# Altium PCB robot_control_pcb.PcbDoc
Units mm, origin at the board's own origin, x right, y up, seen from the top; angles counter-clockwise.
Board outline 100 x 40 mm, 2 copper layers (Top Layer, Bottom Layer); 54 components, 66 nets, 220 pads, 133 vias.
Unrouted connection lines stored in the file: 21.
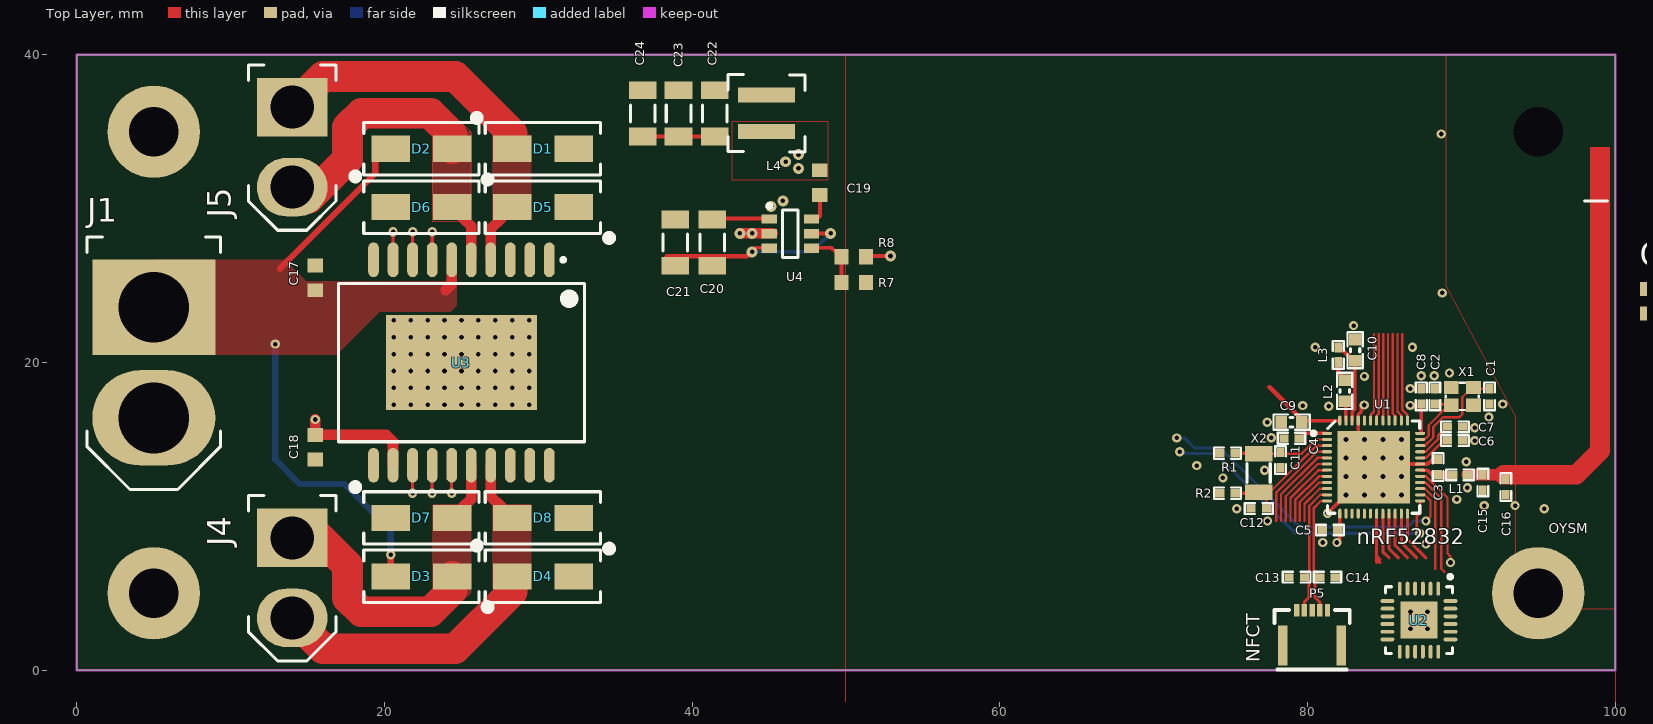
[diagram p0: Top Layer view]
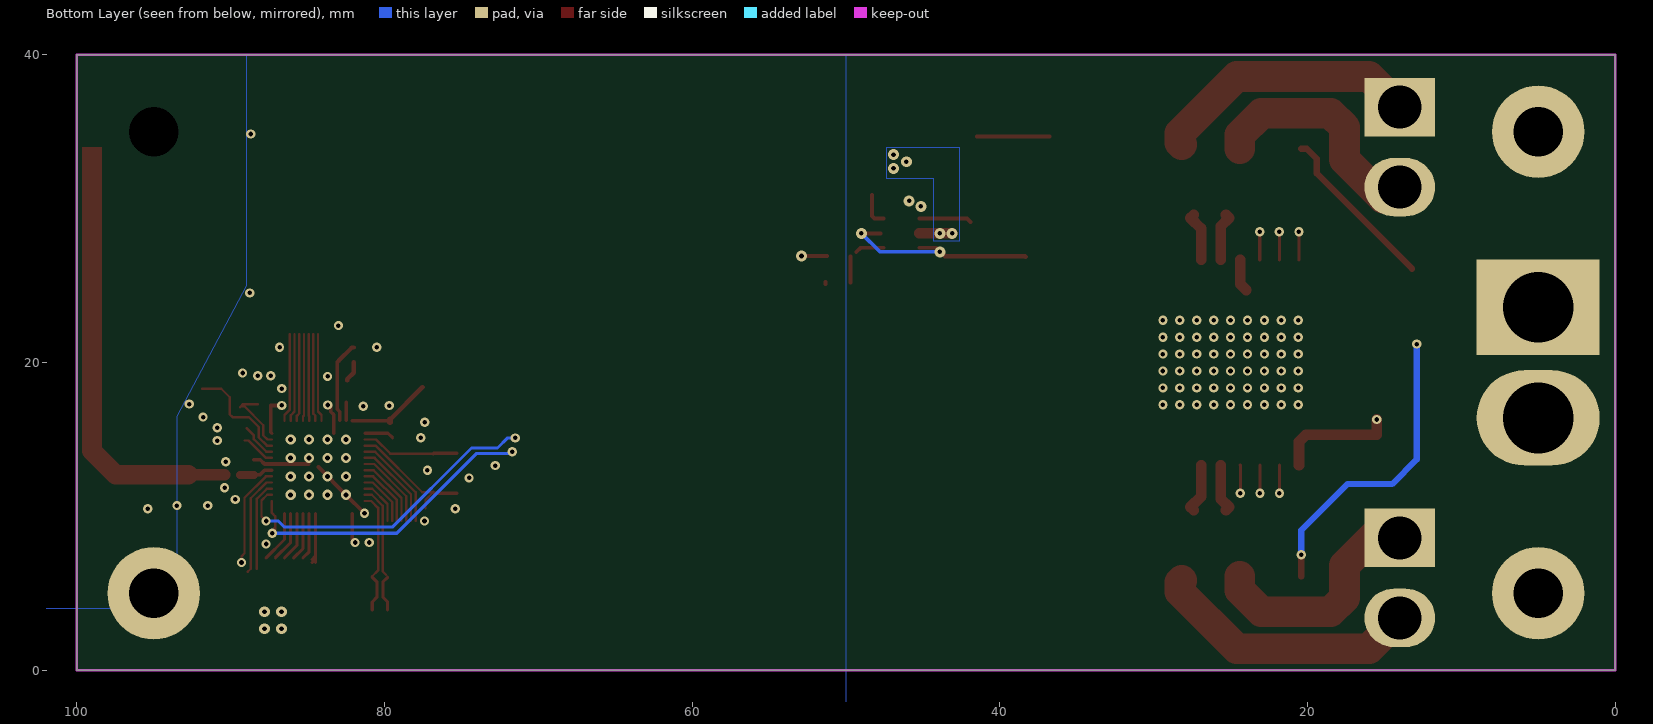
[diagram p1: Bottom Layer view, seen from below]
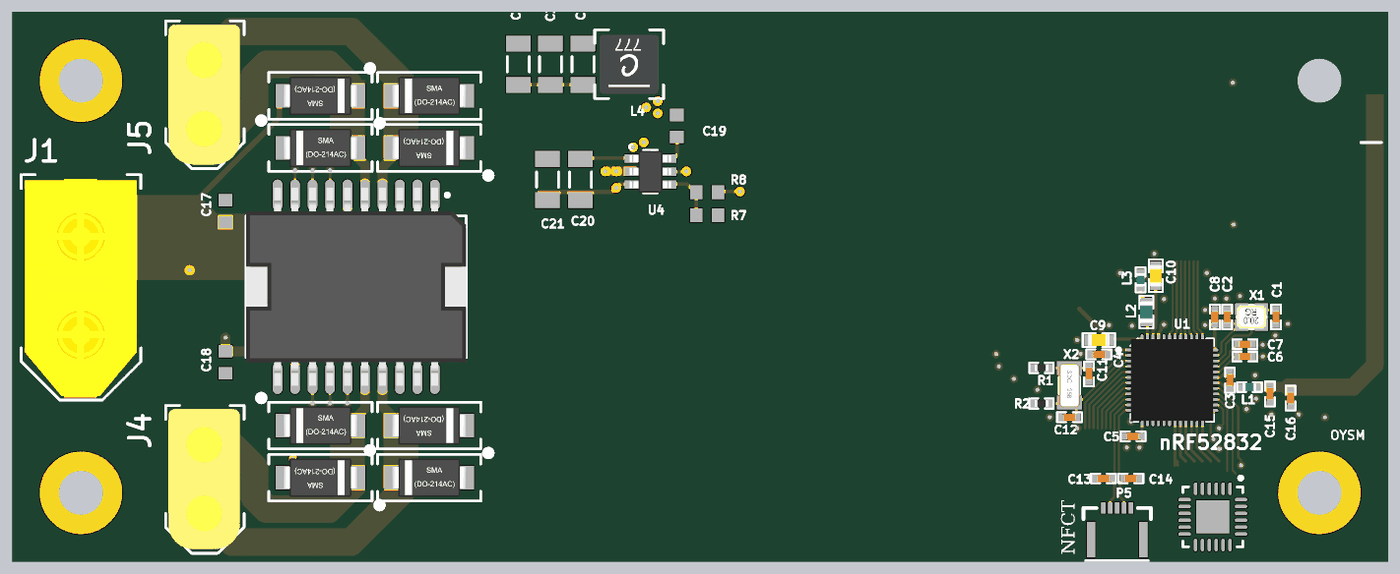
[diagram p2: 3D render of the assembled board from above, using the file's embedded part models]

## Layer stack, top to bottom
Top Solder: solder mask 0.0102, Solder Resist, Dk 3.5
Top Layer: signal copper 0.0356
Dielectric2: core 0.32, FR-4, Dk 4.8
Bottom Layer: signal copper 0.0356
Bottom Solder: solder mask 0.0102, Solder Resist, Dk 3.5

## Board outline
0,0 0,40 100,40 100,0

## Design rules (kind name [scope] priority, off if disabled: settings)
Clearance ANT_Clerance [InNet('ANT')] p1: gap=0.127 ignorepadtopadclearanceinfootprint=FALSE except(0: Arc-Hole Track-Hole SMDPad-Hole THPad-Hole Via-Hole Fill-Hole Poly-Hole Region-Hole Text-Hole)
Clearance Polygon_Clearance [(InNamedPolygon('Top_Layer-GND')) or (InNamedPolygon('Bottom_Layer-GND')) or (InNamedPolygon('Mid_Layer_1-GND')) or (InNamedPolygon('Mid_Layer_2-GND'))] p2: gap=0.254 ignorepadtopadclearanceinfootprint=FALSE except(0: Arc-Hole Track-Hole SMDPad-Hole THPad-Hole Via-Hole Fill-Hole Poly-Hole Region-Hole Text-Hole)
Clearance [All] p3: gap=0.15 ignorepadtopadclearanceinfootprint=FALSE except(0: Arc-Hole Track-Hole SMDPad-Hole THPad-Hole Via-Hole Fill-Hole Poly-Hole Region-Hole Text-Hole)
ComponentClearance [All] p1 off: gap=0.254 collisioncheckmode=3 verticalgap=0.254 showdistances=FALSE
DiffPairsRouting [All] p1: maxlimit=0.15 minlimit=0.15 mostfreqgap=0.15 toplayer_minwidth=0.381 toplayer_maxwidth=0.381 toplayer_prefwidth=0.381 bottomlayer_minwidth=0.381 bottomlayer_maxwidth=0.381 bottomlayer_prefwidth=0.381 maxuncoupledlength=12.7
FabricationTestPointUsage TestPointUsage [All] p1: valid=0 allowmultiple=FALSE
FabricationTestpoint Testpoint [All] p1: side=3 testpointundercomponent=TRUE minsize=1.016 maxsize=2.54 preferedsize=1.524 minholesize=0 maxholesize=1.016 preferedholesize=0.813 testpointgrid=0.025 allowsidetop=TRUE allowsidebottom=TRUE usegrid=TRUE gridtolerance=0
Height [All] p1 off: minheight=0 maxheight=25.4 prefheight=12.7
HoleSize [All] p1: absolutevalues=TRUE maxlimit=5 minlimit=0.3 maxpercent=80.000 minpercent=20.000
MinimumAnnularRing [All] p1 off: minimumring=0.152
PolygonConnect PolygonConnect_Motor [innet('MOTOR_L_A') or innet('MOTOR_L_B') or innet('MOTOR_R_A') or innet('MOTOR_R_B') or InNet('VCC_P14V4')] p1: connectstyle=Direct reliefconductorwidth=0.254 reliefentries=4 polygonreliefangle="90 Angle" airgapwidth=0.254
PolygonConnect PolygonConnect_Buck [innet('SW')] p2: connectstyle=Direct reliefconductorwidth=0.254 reliefentries=4 polygonreliefangle="90 Angle" airgapwidth=0.254
PolygonConnect [All] p3: connectstyle=Relief reliefconductorwidth=0.254 reliefentries=4 polygonreliefangle="90 Angle" airgapwidth=0.254
RoomDefinition pwr [InComponentClass('pwr')] p1: confinementstyle=ConfineIn formatcopy=TRUE lockcomponents=FALSE outline 35.5,24.3 53.503,24.3 53.503,39 35.5,39
RoomDefinition motor_drive [InComponentClass('motor_drive')] p2: confinementstyle=ConfineIn formatcopy=TRUE lockcomponents=FALSE outline 10,0 35.5,0 35.5,40 10,40
RoutingVias [All] p1: holewidth=0.3 width=0.6 viastyle="Through Hole" minholewidth=0.3 minwidth=0.6 maxholewidth=0.711 maxwidth=1.27
SilkToSolderMaskClearance SilkscreenOverComponentPads [IsPad] p1: minsilkscreentomaskgap=0.254 clearancetoexposedcopper=TRUE
SolderMaskExpansion [All] p1: expansion=0.076
Width [All] p1: maxlimit=2.54 minlimit=0.152 preferedwidth=0.2
23 further rules are at their usual default settings.

## Classes and differential pairs
component class robot_control_pcb: J1
component class pwr: C19 C20 C21 C22 C23 C24 L4 R7 R8 U4
component class motor_drive: C17 C18 D1 D2 D3 D4 D5 D6 D7 D8 J4 J5 U3
component class wheel_feedback: J2 J3
component class sensors: C25 U2
component class nrf: C1 C2 C3 C4 C5 C6 C7 C8 C9 C10 C11 C12 C13 C14 C15 C16 C? L1 L2 L3 P3 P5 R1 R2 R? U1 X1 X2

## Components (designator, comment, footprint, x,y, rotation, side; value= is the part's Value field where it differs from the comment)
C1 "12pF" CAPC1005X04L 91.844,17.797 r270 top
C2 "12pF" CAPC1005X04L 88.288,17.797 r90 top
C3 "0.8pF" CAPC1005X04L 88.491,13.2 r270 top
C4 "100nF" CAPC1005X04L 78.966,15.08 r180 top
C5 "100nF" CAPC1005X04L 81.455,9.111 r180 top
C6 "N.C." CAPC1005X04L 89.583,14.927 r180 top
C7 "100pF" CAPC1005X04L 89.583,15.816 r0 top
C8 "100nF" CAPC1005X04L 87.399,17.797 r90 top
C9 "4.7µF" CAPC1608X06L 78.966,16.121 r180 top
C10 "1.0µF" CAPC1608X06L 83.1,20.8 r270 top
C11 "12pF" CAPC1005X04L 78.255,13.657 r270 top
C12 "12pF" CAPC1005X04L 76.832,10.508 r180 top
C13 "300pF" CAPC1005X04L 79.3,6.05 r180 top
C14 "300pF" CAPC1005X04L 81.3,6.05 r180 top
C15 "N.C." CAPC1005X04L 91.4,12.2 r270 top
C16 "1.2pF" CAPC1005X04L 92.9,11.9 r270 top
C17 "100nF" CAPC0603(1608)55_N 15.5,25.5 r270 top
C18 "100nF" CAPC0603(1608)55_N 15.5,14.5 r90 top
C19 "100nF" CAPC0603(1608)55_N 48.3,31.7 r90 top
C20 "10uF" CAPC1206(3216)170_N 41.3,27.8 r270 top
C21 "10uF" CAPC1206(3216)170_N 38.9,27.8 r270 top
C22 "22uF" CAPC1206(3216)170_N 41.477,36.196 r90 top
C23 "22uF" CAPC1206(3216)170_N 39.115,36.196 r90 top
C24 "22uF" CAPC1206(3216)170_N 36.778,36.196 r90 top
C25 "100nF" CAPC0603(1608)55_N 102.117,23.982 r90 top
D1 "SS14" SMA_DO-214AC 30.3,33.9 r0 top
D2 "SS14" SMA_DO-214AC 22.4,33.9 r180 top
D3 "SS14" SMA_DO-214AC 22.4,6.1 r180 top
D4 "SS14" SMA_DO-214AC 30.3,6.1 r0 top
D5 "SS14" SMA_DO-214AC 30.3,30.1 r180 top
D6 "SS14" SMA_DO-214AC 22.4,30.1 r0 top
D7 "SS14" SMA_DO-214AC 22.4,9.9 r0 top
D8 "SS14" SMA_DO-214AC 30.3,9.9 r180 top
J1 "=navn" XT60_Male_Vertical 5,20 r90 top
J2 "B2B-XH-A (LF)(SN)" JST_2P 115.4,-4.5 r0 top
J3 "B2B-XH-A (LF)(SN)" JST_2P 107.5,-4.762 r0 top
J4 "=navn" XT30_Female_Vertical 14,6 r90 top
J5 "=navn" XT30_Female_Vertical 14,34 r90 top
L1 "3.9nH" INDC1005X04L 89.913,12.692 r0 top
L2 "10µH" INDC1608X06L 82.42,18.158 r270 top
L3 "15nH" INDC1005X04L 82,20.5 r270 top
L4 "XAL4030-332MEC" XAL4030 44.83,36.196 r90 top
P3 "Pin Header 2x5, 1.27mm" HDR_2x5-SMD-1.27mm-K 116.9,9.111 r0 top
P5 "FPC 0.5mm RA SMD" FPC_05P-0.5mm-RA-SMD 79.3,3.9 r0 top
R1 "0R" RESC1005X04L 74.8,14.1 r0 top
R2 "0R" RESC1005X04L 74.8,11.5 r0 top
R7 "33k" RESC0603(1608)_N 50.5,25.2 r0 top
R8 "10k" RESC0603(1608)_N 50.5,26.881 r180 top
U1 "nRF52832-QFAA" QFN40P600X600X90-48N 84.3,13.2 r0 top locked
U2 "MPU-9250" QFN05P40X40X02-24 87.25,3.25 r270 top
U3 "L298" SOIC127P1420X360_HS-21M 25,20 r270 top
U4 "TPS562200" SOT95P280X145-6N 46.38,28.379 r0 top
X1 "32MHz" BT-XTAL_2016 90.066,17.797 r180 top
X2 "32.768kHz" XTAL_3215 76.832,12.819 r270 top

## Footprints (in the part's own frame and the unit in brackets; to place one, negate y for a bottom-side part, rotate by r counter-clockwise, add the part's x,y. Pads: shape width x height; smd on the part's side, far side on the other; paste and mask are expansions set on the pad)
BT-XTAL_2016 [mm] "Crystal 2.0 x 1.6 mm"
  rect 0.95x0.85 smd: 1(-0.725,-0.575) 2(0.725,-0.575) 3(0.725,0.575) 4(-0.725,0.575)
  silkscreen extent -1.08,-0.88 1.08,0.88, body extent -1.05,-0.85 1.05,0.85, height 0.56
CAPC0603(1608)55_N [mm] "Chip Capacitor, Body 1.6x0.8mm, Height 0.55mm, IPC Medium Density"
  rect 0.9x1 smd: 1(-0.8,0) 2(0.8,0)
  body extent -0.87,-0.48 0.88,0.47, height 0.55
CAPC1005X04L [mm] "Chip Capacitor, 2-Leads, Body 1.0x0.5mm, IPC High Density"
  rect 0.6x0.5 smd: 1(-0.5,0) 2(0.5,0)
  silkscreen extent -0.9,-0.35 0.9,0.35, body extent -0.51,-0.25 0.51,0.25, height 0.5
CAPC1206(3216)170_N [mm] "Chip Capacitor, Body 3.2x1.6mm, Height 1.7mm, IPC Medium Density"
  rect 1.15x1.8 smd: 1(-1.5,0) 2(1.5,0)
  silkscreen extent -0.55,-0.8 0.55,0.8, body extent -1.7,-0.9 1.7,0.9, height 1.7
CAPC1608X06L [mm] "Chip Capacitor, 2-Leads, Body 1.6x0.8mm, IPC High Density"
  rect 0.75x0.8 smd: 1(-0.675,0) 2(0.675,0)
  silkscreen extent -1.17,-0.5 1.17,0.5, body extent -0.8,-0.43 0.8,0.43, height 0.8
FPC_05P-0.5mm-RA-SMD [mm] "FPC, 5-Leads, Pitch 0,5mm"
  rect 0.6x2.6 smd: 0(-0.9,-2.3) 0(2.9,-2.3)
  rect 0.35x0.8 smd: 1(0,0) 2(0.5,0) 3(1,0) 4(1.5,0) 5(2,0)
  silkscreen extent -1.45,-3.85 3.45,0, body extent -1.45,-3.85 3.45,0, height 2.05
HDR_2x5-SMD-1.27mm-K [mm] "SMT MICRO HEADER, (1,27) .050\" Keying Shroud"
  rect 0.76x2.4 smd: 1(-2.54,-1.95) 2(-2.54,1.95) 3(-1.27,-1.95) 4(-1.27,1.95) 5(0,-1.95) 6(0,1.95) 7(1.27,-1.95) 8(1.27,1.95) 9(2.54,-1.95) 10(2.54,1.95)
  silkscreen extent -3.17,-3.15 3.17,3.15, body extent -3.14,-2.92 3.14,2.92, height 6.11
INDC1005X04L [mm] "Chip Inductor, 2-Leads, Body 1.0x0.5mm, IPC High Density"
  rect 0.65x0.5 smd: 1(-0.475,0) 2(0.475,0)
  silkscreen extent -0.9,-0.35 0.9,0.35, body extent -0.5,-0.3 0.5,0.3, height 0.5
INDC1608X06L [mm] "Chip Inductor, 2-Leads, Body 1.6x0.8mm, IPC High Density"
  rect 0.75x0.8 smd: 1(-0.675,0) 2(0.675,0)
  silkscreen extent -1.17,-0.5 1.17,0.5, body extent -0.8,-0.48 0.8,0.48, height 0.8
JST_2P [mm]
  rect 1.8x1.8 hole 1: 1(0,-1.25)
  round 1.8 hole 1: 2(0,1.25)
  silkscreen extent -2.4,-3.73 3.4,3.73, body extent -2.4,-3.7 3.35,3.7, height 7
QFN05P40X40X02-24 [mm] "QFN24"
  oval 0.9x0.25 smd: 1(-2.05,1.25) 2(-2.05,0.75) 3(-2.05,0.25) 4(-2.05,-0.25) 5(-2.05,-0.75) 6(-2.05,-1.25) 13(2.05,-1.25) 14(2.05,-0.75) 15(2.05,-0.25) 16(2.05,0.25) 17(2.05,0.75) 18(2.05,1.25)
  oval 0.25x0.9 smd: 7(-1.25,-2.05) 8(-0.75,-2.05) 9(-0.25,-2.05) 10(0.25,-2.05) 11(0.75,-2.05) 12(1.25,-2.05) 19(1.25,2.05) 20(0.75,2.05) 21(0.25,2.05) 22(-0.25,2.05) 23(-0.75,2.05) 24(-1.25,2.05)
  rect 2.4x2.4 smd: 25(0,0)
  silkscreen extent -2.95,-2.17 2.17,2.18, body extent -2.02,-2.02 2.02,2.02, height 0.85
QFN40P600X600X90-48N [mm] "QFN, 48-Leads, Body 6,0x6,0mm (max), Pitch 0,40mm, IPC Medium Density"
  oval 0.65x0.2 smd: 1(-3.025,2.2) 2(-3.025,1.8) 3(-3.025,1.4) 4(-3.025,1) 5(-3.025,0.6) 6(-3.025,0.2) 7(-3.025,-0.2) 8(-3.025,-0.6) 9(-3.025,-1) 10(-3.025,-1.4) 11(-3.025,-1.8) 12(-3.025,-2.2) 25(3.025,-2.2) 26(3.025,-1.8) 27(3.025,-1.4) 28(3.025,-1) 29(3.025,-0.6) 30(3.025,-0.2) 31(3.025,0.2) 32(3.025,0.6) 33(3.025,1) 34(3.025,1.4) 35(3.025,1.8) 36(3.025,2.2)
  oval 0.2x0.65 smd: 13(-2.2,-3.025) 14(-1.8,-3.025) 15(-1.4,-3.025) 16(-1,-3.025) 17(-0.6,-3.025) 18(-0.2,-3.025) 19(0.2,-3.025) 20(0.6,-3.025) 21(1,-3.025) 22(1.4,-3.025) 23(1.8,-3.025) 24(2.2,-3.025) 37(2.2,3.025) 38(1.8,3.025) 39(1.4,3.025) 40(1,3.025) 41(0.6,3.025) 42(0.2,3.025) 43(-0.2,3.025) 44(-0.6,3.025) 45(-1,3.025) 46(-1.4,3.025) 47(-1.8,3.025) 48(-2.2,3.025)
  rect 4.7x4.7 smd: 49(0,0)
  silkscreen extent -4.02,-3 3,3, body extent -3.02,-3.02 3.02,3.02, height 0.86
RESC0603(1608)_N [mm] "Chip Resistor, Body 1.6x0.8mm, IPC Medium Density"
  rect 0.9x1 smd: 1(-0.8,0) 2(0.8,0)
  body extent -0.85,-0.47 0.85,0.47, height 0.6
RESC1005X04L [mm] "Chip Resistor, 2-Leads, Body 1.0x0.5mm, IPC High Density"
  rect 0.6x0.55 smd: 1(-0.5,0) 2(0.5,0)
  silkscreen extent -0.87,-0.38 0.88,0.38, body extent -0.5,-0.25 0.5,0.25, height 0.3
SMA_DO-214AC [mm]
  rect 2.5x1.7 smd: 1(-2,0) 2(2,0)
  silkscreen extent -4.5,-1.7 3.75,2.2, body extent -2.75,-1.4 2.75,1.4, height 2.6
SOIC127P1420X360_HS-21M [mm] "SOIC, 20-Leads, Body 15,90x11,00mm, Pitch 1,27mm, Thermal Pad 9,80x6,20mm, IPC Low Density"
  oval 2.25x0.7 smd: 1(-6.675,5.715) 2(-6.675,4.445) 3(-6.675,3.175) 4(-6.675,1.905) 5(-6.675,0.635) 6(-6.675,-0.635) 7(-6.675,-1.905) 8(-6.675,-3.175) 9(-6.675,-4.445) 10(-6.675,-5.715) 11(6.675,-5.715) 12(6.675,-4.445) 13(6.675,-3.175) 14(6.675,-1.905) 15(6.675,-0.635) 16(6.675,0.635) 17(6.675,1.905) 18(6.675,3.175) 19(6.675,4.445) 20(6.675,5.715)
  rect 6.2x9.8 smd: 21(0,0)
  silkscreen extent -6.8,-8 5.15,8, body extent -7.2,-8 7.2,8, height 3.6
SOT95P280X145-6N [mm] "SOT23, 6-Leads, Body 2,90x2,80mm, Pitch 0,95mm, IPC Medium Density"
  rect 1x0.6 smd: 1(-1.375,0.95) 2(-1.375,0) 3(-1.375,-0.95) 4(1.375,-0.95) 5(1.375,0) 6(1.375,0.95)
  silkscreen extent -1.5,-1.55 0.5,1.92, body extent -1.5,-1.53 1.5,1.53, height 1.45
XAL4030 [mm] "SMD Inductor"
  rect 0.98x3.7 smd: 1(-1.185,0) 2(1.185,0)
  silkscreen extent -2.5,-2.5 2.52,2.5, body extent -2.15,-2.15 2.15,2.15, height 3
XT30_Female_Vertical [mm]
  rect 3.8x4.6 hole 2.8: 1(2.6,0)
  oval 3.8x4.6 hole 2.8: 2(-2.6,0)
  silkscreen extent -5.4,-2.85 5.35,2.85, body extent -5.1,-2.55 5.1,2.65, height 9.5
XT60_Male_Vertical [mm]
  rect 6.2x8 hole 4.6: 1(3.6,0)
  oval 6.2x8 hole 4.6: 2(-3.6,0)
  silkscreen extent -8.25,-4.35 8.15,4.35, body extent -8.05,-4.05 7.85,4.1, height 16.3
XTAL_3215 [mm] "XTAL SMD 3.2 x 1.5 mm"
  rect 1x1.8 smd: 1(-1.25,0) 2(1.25,0)
  silkscreen extent -0.6,-0.75 0.6,0.75, body extent -1.6,-0.75 1.6,0.75, height 0.81

## Part data
C1 C2 C11 C12: library part C0402-12p, "Capacitor, NP0, ±2%", Artikkelnr Noca=20029159, Artikkelnr Simpro=N.A., Footprint Doc=0402, LatestRevisionDate=2011-05-11, Note=50V, Part Number=C0402-12p, Pin Count=2, Published=2009-05-08, Publisher="Nordic Semiconductor"
C3: library part C0402-0.8p, "Capacitor, NP0, ±5%", Artikkelnr Noca=20029147, Artikkelnr Simpro=N.A., Footprint Doc=0402, LatestRevisionDate=2012-11-21, Note=50V, Part Number=C0402-0.8p, Pin Count=2, Published=2009-05-08, Publisher="Nordic Semiconductor"
C4 C5 C8: library part C0402-100n, "Capacitor, X7R, ±10%", Artikkelnr Noca=20039200, Artikkelnr Simpro=N.A., Footprint Doc=0402, LatestRevisionDate=2009-11-23, Note=16V, Part Number=C0402-100n, Pin Count=2, Published=2009-05-08, Publisher="Nordic Semiconductor"
C6 C15: library part C0402-N.C., "Not mounted", Artikkelnr Noca=N.A., Artikkelnr Simpro=N.A., Footprint Doc=0402, LatestRevisionDate=2009-05-08, Note="Chip Cap", Part Number=C0402-N.C., Pin Count=2, Published=2009-05-08, Publisher="Nordic Semiconductor"
C7: library part C0402-100p, "Capacitor, NP0, ±5%", Artikkelnr Noca=20029135, Artikkelnr Simpro=N.A., Footprint Doc=0402, LatestRevisionDate=2009-05-08, Note=50V, Part Number=C0402-100p, Pin Count=2, Published=2009-05-08, Publisher="Nordic Semiconductor"
C9: library part C0603-4µ7, "Capacitor, X5R, ±10%", Artikkelnr Noca=20069060, Artikkelnr Simpro=N.A., Footprint Doc=0603, LatestRevisionDate=2009-11-23, Note=6.3V, Part Number=C0603-4µ7, Pin Count=2, Published=2009-05-08, Publisher="Nordic Semiconductor"
C10: library part C0603-1µ0, "Capacitor, X7R, ±10%", Artikkelnr Noca=20039335, Artikkelnr Simpro=N.A., Footprint Doc=0603, LatestRevisionDate=2013-06-05, Note=16V, Part Number=C0603-1µ0, Pin Count=2, Published=2009-05-08, Publisher="Nordic Semiconductor"
C13 C14: library part C0402-300p, "Capacitor, NP0, ±5%", Supplier part number=490-3234-1-ND, Artikkelnr Noca=N.A., Artikkelnr Simpro=N.A., Footprint Doc=0402, LatestRevisionDate=2015-05-29, Note=50V, Part Number=C0402-300p, Pin Count=2, Published=2015-05-29, Publisher="Nordic Semiconductor", Supplier=Digi-Key
C16: library part C0402-1.2p, "Capacitor, NP0, ±0.1pF", Artikkelnr Noca=20029157, Artikkelnr Simpro=N.A., Footprint Doc=0402, LatestRevisionDate=2011-05-11, Note=50V, Part Number=C0402-1.2p, Pin Count=2, Published=2009-05-08, Publisher="Nordic Semiconductor"
C17 C18 C19 C25: library part 5152, "X7R 50V 5%", antall=1000, dybde=0, hylle=0, id=5152, komponenttype=2, lager_type=Baklager, leverandor=Farnell, leverandor_varenr=1759122, navn=100nF, nokkelord="Kondensator, Capacitor, CAP", pakke_opprettet_av=815, pakketype=0603, pris=1, produsent=Multikomp, rad=21, rom=OV, symbol_opprettet_av=815
  C17 C18 C25: pakke_opprettet="2015-02-18 14:18:13", symbol_opprettet="2014-11-14 20:19:34"
  C19: pakke_opprettet="18.02.2015 14:18:13", symbol_opprettet="14.11.2014 20:19:34"
C20 C21: library part 5059, "X5R 50V 10%", id=5059, komponenttype=2, leverandor=Farnell, leverandor_varenr=1845762, navn=10uF, nokkelord="Kondensator, capacitor", pakke_opprettet="11.02.2015 13:21:22", pakke_opprettet_av=815, pakketype=1206, pris=6, produsent=Murata, symbol_opprettet="14.11.2014 20:19:34", symbol_opprettet_av=815
C22 C23 C24: library part 5192, "10V 10% Tantalum", id=5192, komponenttype=2, leverandor=Farnell, leverandor_varenr=1457420, navn=22uF, nokkelord="Capacitor Cap Kondis", pakke_opprettet="11.02.2015 13:21:22", pakke_opprettet_av=815, pakketype=1206, pris=3, produsent=Kemet, symbol_opprettet="14.11.2014 20:19:34", symbol_opprettet_av=815
D1 D2 D3 D4 D5 D6 D7 D8: library part 5642, beskrivelse="SS14-E3/61T - Schottky Rectifier, 40 V, 1 A, Single, DO-214AC, 2 Pins, 500 mV", id=5642, komponenttype=9, leverandor=Farnell, leverandor_varenr=9551280, navn=SS14, nokkelord=Diode, pakke_opprettet="19/01/2020 14:48:44", pakke_opprettet_av=815, pakketype=DO, pris=4, produsent=Vishay, symbol_opprettet="28/06/2014 15:20:09", symbol_opprettet_av=815
J1: library part 4544, "For å koble ledninger sammen", id=4544
J2 J3: library part 4043, antall=120, beskrivelse="JST 2pin (pris pr. stk.)", dybde=0, hylle=6, id=4043, komponenttype=11, lager_type=Fremlager, leverandor=Farnell, leverandor_varenr=1516276, navn="B2B-XH-A (LF)(SN)", nokkelord="Connector, Kontakt", pakke_opprettet="28/06/2014 18:25:03", pakke_opprettet_av=815, pakketype=TH, pris=2, produsent=JST, rad=3, rom=OV, symbol_opprettet="28/06/2014 15:33:17", symbol_opprettet_av=815
J4 J5: library part 4550, "Pris per del, For å koble ledninger sammen", id=4550
L1: library part L0402-3n9, "High frequency chip inductor ±5%", Manufacturer=Murata, Manufacturer Part Number=LQP15MN3N9B02D, Supplier part number=490-1131-1-ND, Artikkelnr Noca=33029151, Artikkelnr Simpro=N.A., Datasheet=http://search.murata.co.jp/Ceramy/image/img/PDF/ENG/L0075S0084LQP15M.pdf, Footprint Doc=0402, LatestRevisionDate=2012-09-19, Note="High frequency chip inductor ±5%", Part Number=L0402-3n9, Pin Count=2, Published=2009-05-08, Publisher="Nordic Semiconductor", Supplier=Digi-Key
L2: library part L0603-10µ, "Chip inductor, IDC,min = 50 mA, ±20%", 2nd source part number=178-6105, Manufacturer="Taiyo Yuden", Manufacturer Part Number=LBMF1608T100K, Supplier part number=587-1714-1-ND, 2nd source Supplier=Farnell, Artikkelnr Noca=33029314, Artikkelnr Simpro=N.A., Datasheet=http://www.yuden.co.jp/ut/product/pdf/elb2_e.pdf, Footprint Doc=0603, LatestRevisionDate=2012-09-19, Note="LBMF1608T100K 10µH 80mA 0603", Part Number=L0603-10µ, Pin Count=2, Published=2010-02-24, Publisher="Nordic Semiconductor", Supplier=Digi-Key
L3: library part L0402-15n, "High frequency chip inductor ±10%", 2nd source part number=658-1328, Manufacturer="Taiyo Yuden", Manufacturer Part Number=HK100515NJ-T, Supplier part number=587-1521-1-ND, 2nd source Supplier=Farnell, Artikkelnr Noca=33029323, Artikkelnr Simpro=N.A., Datasheet=http://www.yuden.co.jp/productdata/catalog/en/mlci04_e.pdf, Footprint Doc=0402, LatestRevisionDate=2012-09-19, Note="High frequency chip inductor ±10%", Part Number=L0402-15n, Pin Count=2, Published=2010-07-12, Publisher="Nordic Semiconductor", Supplier=Digi-Key
L4: library part 5644, "3.3µH", id=5644, komponenttype=3, leverandor=Farnell, leverandor_varenr=2289055, navn=XAL4030-332MEC, nokkelord="3.3uH, 3u3H, 3,3uH, 3µ3H", pakke_opprettet="23.01.2020 22:27:27", pakke_opprettet_av=815, pakketype=SMD, pris=40, produsent=Coilcraft, symbol_opprettet="27.05.2015 00:20:21", symbol_opprettet_av=924
P3: library part "Pin Header 2x5 SMD, 1.27mm, KS", "Pin Header 2x5, 1.27mm (50mil), SMD, Keying Shroud", 2nd source part number=FTSH-105-01-F-DV-K, Manufacturer=W-CON, Manufacturer Part Number=3132-10MS0BK00R1, 2nd source Supplier=Samtec, Artikkelnr Noca=55010009, Artikkelnr Simpro=N.A., Datasheet=\\hizz\pro\app9717\Datasheet\connectores\W-CON\3132-XXMXXBK00XX.pdf, Footprint Doc=HDR_2x5-SMD-1.27mm, LatestRevisionDate=2016-04-21, Part Number="Pin Header 2x5 SMD, 1.27mm, KS", Pin Count=10, Published=2016-01-22, Publisher="Nordic Semiconductor", Supplier=Cabcon, Supplier part number=3132-10MS0BK00R1
P5: library part FPC_05P-0.5mm-RA-SMD, "0.5mm FPC, 5P,Right Angle SMT,Double Contact,H=1.2mm,White, Tin plated", 2nd source part number=WM9836CT-ND, Manufacturer=W-CON, Manufacturer Part Number=5141-05RZDNWR01, 2nd source Supplier=Digi-Key, Artikkelnr Noca=55010020, Artikkelnr Simpro=N.A., Datasheet=\\hizz\pro\app9717\Datasheet\connectores\W-CON\5141-XXRZDNXX0X.pdf, Footprint Doc=FPC_05P-0.5mm-RA-SMD, LatestRevisionDate=2016-04-21, Part Number=FPC_05P-0.5mm-RA-SMD, Pin Count=7, Published=2015-06-22, Publisher="Nordic Semiconductor", Supplier=Cabcon, Supplier part number=5141-05RZDNWR01
R1 R2: library part R0402-0R, "Resistor, ±5%, 0.063W", Supplier part number=146-9661, Value Ohm=0, Artikkelnr Noca=27049000, Artikkelnr Simpro=N.A., Footprint Doc=0402, LatestRevisionDate=2009-11-23, Note="Chip Res 5%", Part Number=R0402-0R, Pin Count=2, Published=2009-05-08, Publisher="Nordic Semiconductor", Supplier=Farnell
R7: library part 5397, "0.1W 1% Thick film resistor", antall=100, dybde=84, hylle=2, id=5397, komponenttype=1, lager_type=Fremlager, navn=33k, pakke_opprettet="08.07.2014 21:15:30", pakke_opprettet_av=815, pakketype=0603, pris=0, rad=-1, rom=OV, symbol_opprettet="08.07.2014 21:16:33", symbol_opprettet_av=815
R8: library part 5264, "0.1W 1% Thick film resistor", antall=1200, dybde=3, hylle=6, id=5264, komponenttype=1, lager_type=Baklager, leverandor=Farnell, leverandor_varenr=2447230, navn=10k, nokkelord="Resistor Motstand", pakke_opprettet="08.07.2014 21:15:30", pakke_opprettet_av=815, pakketype=0603, pris=0, produsent=Multikomp, rad=1, rom=OV, symbol_opprettet="08.07.2014 21:16:33", symbol_opprettet_av=815
U1: "Multi-protocol Bluetooth Low Energy and 2.4GHz proprietary system-on-chip", Manufacturer="Nordic Semiconductor", Artikkelnr Noca=N.A., Artikkelnr Simpro=N.A., Footprint Doc=QFN-48, LatestRevisionDate=2014-11-26, Manufacturer Part Number=nRF52832-QFAA, Part Number=nRF52832-QFAA, Pin Count=48, Published=2014-11-26, Publisher="Nordic Semiconductor", Supplier="Nordic Semiconductor"
U2: library part 5302, "=beskrivelse", antall=40, beskrivelse="MotionTracking device", dybde=0, hylle=2, id=5302, kolonne=4, komponenttype=6, lager_type=Fremlager, navn=MPU-9250, nokkelord="Narrow Band Multi-Channel RF Transceiver Module", pakke_opprettet="22.01.2016 16:18:46", pakke_opprettet_av=815, pakketype=QFN, pris=0, produsent=InvenSense, rad=4, rom=OV, symbol_opprettet="22.01.2016 16:19:50", symbol_opprettet_av=815
U3: library part 5620, "Dual H Bridge", id=5620, komponenttype=15, leverandor=Farnell, leverandor_varenr=2762686, navn=L298, nokkelord="h-bro, h-bridge, driver, motor driver, motordriver, l298n", pakke_opprettet="18.01.2020 20:43:17", pakke_opprettet_av=815, pakketype=SMD, pris=84, produsent=ST, symbol_opprettet="18.01.2020 20:24:51", symbol_opprettet_av=815
U4: library part 5645, beskrivelse="DC-DC Switching Buck Step Down Regulator, Adjustable, 4.5V-17Vin, 760mV-7Vout, 2Aout", id=5645, komponenttype=15, leverandor=Farnell, leverandor_varenr=2420234, navn=TPS562200, pakke_opprettet="25.11.2016 18:04:01", pakke_opprettet_av=1335, pakketype=SOT-23, pris=12, produsent="Texas Instruments", symbol_opprettet="23.01.2020 22:46:07", symbol_opprettet_av=815
X1: library part XTAL_SMD2016_32MHz_8pF_Epson, "XTAL SMD 2016, 32MHz, Cl=8pF, Total Tol: ±40ppm", Manufacturer="Epson Toyocom", Manufacturer Part Number=Q22FA12800025, Supplier part number=171-2806, Artikkelnr Noca=N.A., Artikkelnr Simpro=N.A., Datasheet=http://www.epsondevice.com/docs/qd/en/DownloadServlet?id=ID000449, Footprint Doc=XTAL_2016, LatestRevisionDate=2014-11-27, Note="XTAL SMD 32.000MHz", Part Number=XTAL_SMD2016_32MHz_8pF_Epson, Pin Count=4, Published=2012-03-09, Publisher="Nordic Semiconductor", Supplier=Farnell
X2: library part "XTAL_FC-135 32.768k", "XTAL SMD 3215, 32.768kHz, 9pF, ±20ppm", 2nd source part number=127-8037, Manufacturer="Epson Toyocom", Manufacturer Part Number="FC-135 32.768KHZ ±20PPM,9.0PF", Supplier part number="FC-135 32.7680KA-AC-ND", 2nd source Supplier=Farnell, Artikkelnr Noca=22019091, Artikkelnr Simpro=N.A., Datasheet=http://www.farnell.com/datasheets/57480.pdf, Footprint Doc=XTAL_3215, LatestRevisionDate=2014-03-27, Note="XTAL SMD 32.768kHz, 3215", Part Number="XTAL_FC-135 32.768k", Pin Count=2, Published=2010-10-18, Publisher="Nordic Semiconductor", Supplier=Digi-Key

## Free pads (board coordinates)
  round 6 hole 3.2: 0(5,5) 0(5,35) 0(95,5)
  round 0 hole 3.2 unplated: 0(95,35)

## Via types
v1: diameter 0.6, hole 0.3, Top Layer to Bottom Layer, 56 vias
v2: diameter 0.6, hole 0.3, Top Layer to Bottom Layer, tented both sides, 47 vias
v3: diameter 0.66, hole 0.33, Top Layer to Bottom Layer, tented both sides, 16 vias
v4: diameter 0.711/0.711 (per signal layer), hole 0.305, Top Layer to Bottom Layer, 10 vias
v5: diameter 0.7, hole 0.3, Top Layer to Bottom Layer, 4 vias

## Nets (pads, with @x,y where several pads share a name; then routed paths per layer and width w, separated by ;. In a path a pad name is that pad's centre, name@x,y a point inside that pad or via, vN(x,y) a via of type N, cw(c..) or ccw(c..) an arc to the next point about the centre after c; other vN are vias at no path point)
ANT: C15.1 C16.1 L1.2 | length 30.5
  Top Layer w0.762: L1.2@90.396,12.698 91.4,12.704 95.004,12.723
  Top Layer w1.27: 92.77,12.7 97.459,12.7 99.018,14.259 99.018,33.3
DEC1: C4.1 U1.1 | length 1.9
  Top Layer w0.203: C4.1@79.47,15.099 79.771,15.4 U1.1
DEC2: C6.2 U1.32 | length 2.2
  Top Layer w0.152: U1.32 87.711,13.8 88.838,14.927 C6.2 C6.2@89.101,14.927
DEC3: C7.1 U1.33 | length 2.4
  Top Layer w0.152: U1.33 87.68,14.2 88.491,15.011 88.491,15.262 C7.1@88.975,15.746
DEC4: C10.2 L3.1 U1.46 | length 5.3
  Top Layer w0.229: U1.46@82.9,16.256 82.9,16.811 83.087,16.998 83.087,20.013 C10.2@82.975,20.125
  Top Layer w0.279: L3.1 82.125,20.975 C10.2@82.975,20.125
"Enable A": U3.8 | length 1.8
  Top Layer w0.2: U3.8@21.823,26.673 21.828,26.678 v2(21.828,28.497)
"Enable B": U3.14 | length 1.8
  Top Layer w0.2: v2(23.093,11.503) 23.093,13.323 U3.14@23.098,13.328
GND: C1.2 C2.2 C3.1 C4.2 C5.2 C6.1 C7.2 C8.2 C9.2 C10.1 C11.2 C12.2 C13.2 C14.1 C15.2 C16.2 C17.1 C18.1 C20.1 C21.1 C22.1 C23.1 C24.1 C25.1 D5.1 D6.1 D7.1 D8.1 J1.2 P3.3 P3.5 P3.9 pad.0@5,5 pad.0@5,35 pad.0@95,5 R8.1 U1.31 U1.45 U1.49 U3.1 U3.2 U3.10 U3.11 U3.19 U3.20 U3.21 U4.1 X1.2 X1.4 | length 19.6
  Top Layer w0.229: U1.49@83.3,15.4 U1.45 83.3,16.62 83.487,16.807 v2@83.487,17.239 ; U1.49@84.918,13.403 87.799,13.403 88.086,13.69 C3.1@88.499,13.69
  Top Layer w0.254: C24.1 C23.1 C22.1 ; C20.1@41.896,29.129 42.138,29.37 U4.1@45.237,29.37 ; R8.1@51.237,26.925 v4(52.888,26.925) ; v2(81.303,10.2) 81.303,10.203 v3(82.5,11.4) U1.49
  other v1: 20.6,17.25 21.7,17.25 22.8,17.25 23.9,17.25 25,17.25 26.1,17.25 27.2,17.25 28.3,17.25 29.4,17.25 20.6,18.35 21.7,18.35 22.8,18.35 23.9,18.35 25,18.35 26.1,18.35 27.2,18.35 28.3,18.35 29.4,18.35 20.6,19.45 21.7,19.45 22.8,19.45 23.9,19.45 25,19.45 26.1,19.45 27.2,19.45 28.3,19.45 29.4,19.45 20.6,20.55 21.7,20.55 22.8,20.55 23.9,20.55 25,20.55 26.1,20.55 27.2,20.55 28.3,20.55 29.4,20.55 20.6,21.65 21.7,21.65 22.8,21.65 23.9,21.65 25,21.65 26.1,21.65 27.2,21.65 28.3,21.65 29.4,21.65 20.6,22.75 21.7,22.75 22.8,22.75 23.9,22.75 25,22.75 26.1,22.75 27.2,22.75 28.3,22.75 29.4,22.75
  other v2: 87.7,8.2 81,8.3 77.4,9.7 75.4,10.5 95.4,10.5 91.5,10.7 93.5,10.7 89.7,11.1 90.396,11.854 74.5,12.5 77.213,12.997 72.8,13.3 90.324,13.55 90.879,14.927 77.645,15.105 90.879,15.765 77.391,16.121 91.793,16.451 81.379,17.162 79.7,17.2 83.69,17.239 92.7,17.3 86.688,18.305 83.7,19.1 87.399,19.144 88.237,19.144 89.228,19.321 80.5,21 86.822,21 83,22.4 88.756,24.529 88.7,34.859
  other v3: 83.7,11.4 84.9,11.4 86.1,11.4 82.5,12.6 83.7,12.6 84.9,12.6 86.1,12.6 82.5,13.8 83.7,13.8 84.9,13.8 86.1,13.8 82.5,15 83.7,15 84.9,15 86.1,15
  other v4: 45.135,30.157 45.897,30.513
"Input 1": U3.7 | length 1.8
  Top Layer w0.2: U3.7 23.1,26.68 v2(23.1,28.5)
"Input 2": U3.9 | length 1.8
  Top Layer w0.2: U3.9@20.553,26.673 20.558,26.678 v2(20.558,28.497)
"Input 3": U3.13 | length 1.8
  Top Layer w0.2: v2(21.823,11.503) 21.823,13.323 U3.13@21.828,13.328
"Input 4": U3.15 | length 1.8
  Top Layer w0.2: v2(24.363,11.503) 24.363,13.323 U3.15@24.368,13.328
MOTOR_L_A: D1.1 D5.2 J5.1 U3.4 | length 20.7
  Top Layer w0.7: U3.4 26.905,28.705 27.6,29.4 D5.2@27.4,29.6
  Top Layer w2: J5.1 16,38.6 24.6,38.6 28.3,34.9 28.3,34.3 D1.1@28.175,34.175
MOTOR_L_B: D2.1 D6.2 J5.2 U3.5 | length 18.9
  Top Layer w0.7: D6.2@25.3,29.6 25.1,29.4 25.635,28.865 U3.5
  Top Layer w2: J5.2 14.4,31.4 15.1,30.7 17.6,33.2 17.6,35.3 18.5,36.2 23,36.2 24.4,34.8 24.4,34.2 D2.1
MOTOR_R_A: D3.1 D7.2 J4.1 U3.16 | length 18.9
  Top Layer w0.7: D7.2@25.3,10.4 25.1,10.6 25.635,11.135 U3.16
  Top Layer w2: J4.1 14.4,8.6 15.1,9.3 17.6,6.8 17.6,4.7 18.5,3.8 23,3.8 24.4,5.2 D3.1
MOTOR_R_B: D4.1 D8.2 J4.2 U3.17 | length 20.7
  Top Layer w0.7: U3.17 26.905,11.295 27.6,10.6 D8.2@27.4,10.4
  Top Layer w2: J4.2 16,1.4 24.6,1.4 28.3,5.1 28.3,5.7 D4.1@28.175,5.825
NetC3_2: C3.2 L1.1 U1.30 | length 2.2
  Top Layer w0.229: U1.30 87.8,13 88.11,12.69 C3.2@88.499,12.69
  Top Layer w0.508: C3.2@88.491,12.695 L1.1@89.388,12.695
NetL2_1: L2.1 L3.2 | length 1.4
  Top Layer w0.279: L3.2 82,19.341 82.42,18.921 L2.1
NetL2_2: L2.2 U1.47 | length 1.1
  Top Layer w0.229: U1.47@82.5,16.256 L2.2@82.5,17.404
P0.00: R1.1
P0.00/XL1: C11.1 R1.2 U1.2 X2.1 | length 6.4
  Top Layer w0.152: X2.1 79.617,14.069 80.548,15 U1.2
  Top Layer w0.2: R1.2 76.801,14.1 X2.1
P0.01: R2.1
P0.01/XL2: C12.1 R2.2 U1.3 X2.2 | length 8.5
  Top Layer w0.152: C12.1 77.332,11.069 X2.2 77.548,11.569 80.579,14.6 U1.3
  Top Layer w0.2: R2.2 76.763,11.5 X2.2
P0.02/AIN0: U1.4 | length 6.3
  Top Layer w0.152: 77.978,9.7 77.978,11.567 80.611,14.2 U1.4
P0.03/AIN1: U1.5 | length 5.7
  Top Layer w0.152: 78.281,9.7 78.281,11.438 80.643,13.8 U1.5
P0.04/AIN2: U1.6 | length 5.2
  Top Layer w0.152: 78.586,9.7 78.586,11.311 80.675,13.4 U1.6
P0.05/AIN3: U1.7 | length 4.6
  Top Layer w0.152: 78.894,9.7 78.894,11.184 80.709,13 U1.7
P0.06: U1.8 | length 4.1
  Top Layer w0.152: 79.198,9.7 79.198,11.058 80.74,12.6 U1.8
P0.07: U1.9 | length 3.5
  Top Layer w0.152: 79.503,9.7 79.503,10.932 80.771,12.2 U1.9
P0.08: U1.10 | length 3
  Top Layer w0.152: 79.808,9.7 79.808,10.805 80.803,11.8 U1.10
P0.09/NFC1: C13.1 P5.2 U1.11 | length 8.4
  Top Layer w0.152: C13.1@79.9,6.2 80.113,6.413 80.113,10.679 80.834,11.4 U1.11
  Top Layer w0.2: P5.2 79.8,4.432 80.1,4.732 80.1,5.75 C13.1
P0.10/NFC2: C14.2 P5.4 U1.12 | length 8.1
  Top Layer w0.152: C14.2@80.8,6.1 80.418,6.482 80.418,10.553 80.865,11 U1.12
  Top Layer w0.2: P5.4 80.8,4.432 80.5,4.732 80.5,5.75 C14.2
P0.11: U1.14
P0.12: U1.15
P0.13: U1.16
P0.14/TRACEDATA3: U1.17
P0.15/TRACEDATA2: U1.18
P0.16/TRACEDATA1: U1.19 | length 4.1
  Top Layer w0.2: U1.19 84.5,7 84.5,7.2 ; 84.7,7 84.5,7.2 ; 84.7,7.2 84.5,7.4 84.5,7.2
P0.17: U1.20 | length 3
  Top Layer w0.2: U1.20 84.9,7.7 85.3,7.3
P0.18/SWO/TRCD0: P3.6 U1.21 | length 3.1
  Top Layer w0.2: U1.21 85.3,7.9 85.9,7.3
P0.19: U1.22 | length 3.2
  Top Layer w0.2: U1.22 85.7,8.1 86.5,7.3
P0.20/TRACECLK: U1.23 | length 3.3
  Top Layer w0.2: U1.23 86.1,8.3 87.1,7.3
P0.21/RESET: P3.10 U1.24 | length 3.4
  Top Layer w0.2: U1.24 86.5,8.5 87.7,7.3
P0.22: U1.27 | length 5.8
  Top Layer w0.152: U1.27 87.649,11.8 88.3,11.149 88.3,6.6
P0.23: U1.28 | length 6.7
  Top Layer w0.152: U1.28 87.68,12.2 88.7,11.18 88.7,6.6 88.9,6.4
P0.24: U1.29 | length 6.6
  Top Layer w0.152: U1.29 87.711,12.6 89.1,11.211 89.1,7.6 89.3,7.4 v2(89.3,7)
P0.25: U1.37 | length 5.8
  Top Layer w0.152: 86.154,21.846 86.154,16.939 86.5,16.594 U1.37
P0.26: U1.38 | length 5.7
  Top Layer w0.152: 85.849,21.846 85.849,16.813 86.1,16.563 U1.38
P0.27: U1.39 | length 5.7
  Top Layer w0.152: 85.545,21.846 85.545,16.687 85.7,16.532 U1.39
P0.28/AIN4: U1.40 | length 5.6
  Top Layer w0.152: 85.24,21.846 85.24,16.561 85.3,16.501 U1.40
P0.29/AIN5: U1.41 | length 5.6
  Top Layer w0.152: U1.41 84.9,16.52 84.935,16.555 84.935,21.846
P0.30/AIN6: U1.42 | length 5.7
  Top Layer w0.152: U1.42 84.5,16.551 84.63,16.681 84.63,21.846
P0.31/AIN7: U1.43 | length 5.7
  Top Layer w0.152: U1.43 84.1,16.582 84.325,16.808 84.325,21.846
SCL: U2.23
SDA: U2.24
SW: C19.2 L4.1 U4.2 | length 2.2
  Top Layer w0.7: v4(43.1,28.4) v4(43.9,28.4) 43.895,28.4 43.89,28.405 U4.2@45.237,28.405
  other v4: 46.913,32.621 46.075,33.053 46.913,33.51
SWDCLK: P3.4 U1.25 | length 20.7
  Top Layer w0.152: v2@87.1,8.8 v2@87.1,9.1 ; v2(87.3,8.9) v2@87.1,9.1 ; U1.25 87.325,10.225 87.1,10 87.1,9.3 v2@87.1,9.1
  Top Layer w0.153: 87.1,9.3 v2@87.3,9.1
  Bottom Layer w0.2: v2(71.7,14.2) 71.804,14.096 74.004,14.096 79.2,8.9 v2(87.3,8.9)
SWDIO: P3.2 U1.26 | length 21
  Top Layer w0.152: U1.26 87.621,11.4 87.998,11.024 87.998,9.998 v2(87.7,9.7)
  Bottom Layer w0.2: v2(71.5,15.1) 72,15.1 72.654,14.446 74.348,14.446 79.494,9.3 86.5,9.3 86.9,9.7 v2(87.7,9.7)
VBST: C19.1 U4.6 | length 2.2
  Top Layer w0.254: U4.6@47.573,29.37 48.143,29.37 48.308,29.535 C19.1@48.308,30.892
VCC_P3V3: C22.2 C23.2 C24.2 C25.2 L4.2 R7.2 U2.8 | length 0.1
  Top Layer w0.254: R7.2@51.338,25.098 R7.2@51.338,25.225
VCC_P5V0: C18.2 U3.12 | length 7.8
  Top Layer w0.7: v2(15.5,16.3) C18.2 20.1,15.3 20.555,14.845 U3.12
VCC_P14V4: C17.2 C20.2 C21.2 D1.2 D2.2 D3.2 D4.2 J1.1 U3.6 U4.3 U4.5 | length 47.4
  Top Layer w0.25: U4.5 49.171,28.379 49.15,28.4 v4(49,28.4)
  Top Layer w0.254: v4(43.9,27.2) 43.9,27.246 44.119,27.465 U4.3@45.237,27.465
  Top Layer w0.305: 38.328,26.881 38.379,26.906 43.56,26.906 43.854,27.2 v4(43.9,27.2)
  Top Layer w0.4: 13.2,26.1 13.3,26.2 19.4,32.3 19.4,33.25 20.05,33.9 D2.2 ; D3.2 v1(20.4,7.5)
  Top Layer w0.7: 23.98,24.72 24.365,25.105 U3.6
  Bottom Layer w0.254: v4(43.9,27.2) 47.8,27.2 v4(49,28.4)
  Bottom Layer w0.4: v1(12.9,21.2) 12.9,13.7 14.5,12.1 17.4,12.1 20.4,9.1 v1(20.4,7.5)
VDD_P3V3: C5.1 C8.1 C9.1 P3.1 U1.13 U1.36 U1.48 | length 10.2
  Top Layer w0.2: U1.36 U1.36@87.399,15.474
  Top Layer w0.229: C9.1@79.645,16.285 79.73,16.2 U1.48@82.09,16.2 ; v2(81.912,8.298) 82.1,8.485 U1.13
  Top Layer w0.254: v2(86.688,17.213) 86.705,17.196 87.399,17.196 U1.36@87.399,15.474
  Top Layer w0.3: 77.535,18.395 C9.1@79.645,16.285
  Top Layer w0.381: C9.1@79.645,16.115 C9.1@79.645,16.285 ; v2@81.839,8.298 v2(81.912,8.298)
VFB: R7.1 R8.2 U4.4 | length 3.6
  Top Layer w0.254: U4.4@47.573,27.465 49.036,27.465 R8.2@49.334,27.18 ; R7.1 R8.2
XC1: C1.1 U1.34 X1.1 | length 7.1
  Top Layer w0.152: U1.34 87.649,14.6 88.183,15.134 88.183,15.803 88.832,16.451 89.888,16.451 90.066,16.629 90.066,17.747 90.617,18.297 C1.1
XC2: C2.1 U1.35 X1.3 | length 4.5
  Top Layer w0.152: U1.35 87.615,15 87.879,15.264 87.879,15.929 89.112,17.162 X1.3@89.329,17.162 ; C2.1@88.237,17.297 C2.1 89.194,17.297 X1.3@89.329,17.162 ; X1.3@89.394,17.097 X1.3@89.329,17.162
pads on no net: J2.1 J2.2 J3.1 J3.2 P3.7 P3.8 P5.0 P5.1 P5.3 P5.5 U1.44 U2.1 U2.2 U2.3 U2.4 U2.5 U2.6 U2.7 U2.9 U2.10 U2.11 U2.12 U2.13 U2.14 U2.15 U2.16 U2.17 U2.18 U2.19 U2.20 U2.21 U2.22 U2.25 U3.3 U3.18
copper on no net:
  other v5: 86.7,2.7 87.8,2.7 86.7,3.8 87.8,3.8

## Polygon pours and split planes (outlines as drawn)
SW on Bottom Layer "Top Layer-No Net" (solid, shelved, pour order 6): 42.646,27.897 44.297,27.897 44.297,31.961 47.345,31.961 47.345,33.993 42.646,33.993
GND on Bottom Layer "Bottom_Layer-GND" (solid, remove dead copper, shelved, pour order 23): 50,-10 50,40 89,40 89,25 93.5,16.5 93.5,4 102.5,4 102.5,-10
VCC_P14V4 on Top Layer "Top Layer-VCC_P14V4" (solid, pour order 35): 24.7,23.7 24.3,23.3 19.7,23.3 16.9,20.5 5.05,20.5 5,20.55 5,26.675 13.525,26.675 14.9,25.3 24.7,25.3
MOTOR_L_A on Top Layer "Top Layer-MOTOR_L_A" (solid, pour order 33): 27,29.3 26.995,29.305 26.995,34.8 29.535,34.8 29.535,29.3
MOTOR_L_B on Top Layer "Top Layer-MOTOR_L_B" (solid, pour order 29): 23.1,29.547 23.095,29.552 23.095,35.048 25.635,35.048 25.635,29.547
no net on Top Layer "Top Layer-No Net 1" (solid, pour order 31): 25.635,34.9 25.6,35 25,35.6 23.1,35.6 23.099,34.699 23.095,29.2 25.635,29.2
MOTOR_R_B on Top Layer "Top Layer-MOTOR_R_B" (solid, pour order 27): 27,5.298 26.995,5.303 26.995,10.798 29.535,10.798 29.535,5.298
MOTOR_R_A on Top Layer "Top Layer-MOTOR_R_A" (solid, pour order 25): 25.635,5.1 25.6,5 25,4.4 23.1,4.4 23.099,5.301 23.095,10.8 25.635,10.8
SW on Top Layer "Top Layer-No Net" (solid, shelved, pour order 11): 42.595,35.7 48.8,35.7 48.8,31.859 42.595,31.859
GND on Top Layer "Top_Layer-GND" (solid, remove dead copper, shelved, pour order 19): 50,-10 50,40 89,40 89,25 93.5,16.5 93.5,4 100,4 100,-10

## Keep-outs
Keep-Out Layer:
  the board outline again, w0.152

## Other copper
Top Layer:
  rectangle net ANT: 98.383,33.288 99.653,34
  pour cut-out: 46.9,35.7 46.9,36.9 43,36.9 43,37.2 35.7,37.2 35.7,35.9 42.6,35.9 42.6,35.7
  pour cut-out: 46.934,35.7
  pour cut-out: 42.341,33.867 42.595,33.867 42.595,31.859 49.054,31.859 49.054,28.9 46.4,28.9 46.405,30.97 42.341,30.97 42.341,33.867 42.507,33.867 42.595,33.867
  pour cut-out: 90.015,11.6 87.272,11.6 87.272,14.495 90.015,14.495
  pour cut-out: 90.637,16.32 90.664,16.347 90.664,16.543 90.243,16.543 90.2,16.5 90.22,16.32
  pour cut-out: 94.8,13.4 94.8,14.3 95.004,14.354 96,14.354 96,13.4

## Silkscreen, mask and mechanical layers (free items; w line width, h text height)
Top Overlay:
  lines w0.2: 48,112.5 70,112.5 ; 50,108 50,117 ; 52,108 52,117 ; 54,108 54,117 ; 56,108 56,117 ; 58,108 58,117 ; 60,108 60,117 ; 62,108 62,117 ; 64,108 64,117 ; 66,108 66,117 ; 68,108 68,117 ; 98,30.5 99.5,30.5 ; 48,108 70,108 70,117 48,117 48,108
  text "GND" at 65.5,113.25 h1.5 r90
  text "P3V3" at 67.5,113.25 h1.5 r90
  text "P0.23" at 49.5,113 h1.5 r90
  text "P0.22" at 51.5,113 h1.5 r90
  text "P0.21" at 53.5,113 h1.5 r90
  text "P0.20" at 55.435,113 h1.5 r90
  text "P0.19" at 57.5,113 h1.5 r90
  text "P0.18" at 59.5,113 h1.5 r90
  text "P0.17" at 61.5,113 h1.5 r90
  text "P0.16" at 63.5,113 h1.5 r90
  text "P5V0" at 70,112.5 h1.5 r90
  text "P5V0" at 49.5,108.75 h1.5 r90
  text "P3V3" at 51.5,108.75 h1.5 r90
  text "GND" at 53.5,108.75 h1.5 r90
  text "P0.31" at 55.5,108.5 h1.5 r90
  text "P0.30" at 57.5,108.5 h1.5 r90
  text "P0.29" at 59.5,108.5 h1.5 r90
  text "P0.28" at 61.5,108.5 h1.5 r90
  text "P0.27" at 63.5,108.5 h1.5 r90
  text "P0.26" at 65.5,108.5 h1.5 r90
  text "P0.25" at 67.5,108.5 h1.5 r90
  text "P0.24" at 69.5,108.5 h1.5 r90
  text "OYSM" at 95.7,8.9 h0.64
  text "DEBUG" at 122.3,8.6 h1.5
  text "nRF52832" at 83.2,8.2 h1
  text "NFCT" at 77.2,0.5 h1.5 r90
  text "NORDIC" at 73.4,-16.4 h3.81
  text "SEMIDESTRUCTORS" at 73.314,-17.891 h1.65
  text "Robot controller" at 72.8,-20.8 h2
Bottom Overlay:
  lines w0.2: -3.17,95.1 24.77,95.1 ; -3.17,121.1 24.77,121.1 ; -0.63,99.6 -0.63,90.6 1.735,90.6 ; -0.63,125.6 -0.63,116.6 1.735,116.6 ; 1.91,99.6 1.91,90.6 3.735,90.6 ; 1.91,125.6 1.91,116.6 3.735,116.6 ; 4.45,99.6 4.45,90.6 5.735,90.6 ; 4.45,125.6 4.45,116.6 5.735,116.6 ; 6.99,90.6 6.99,91.345 6.99,99.6 ; 6.99,116.6 6.99,117.345 6.99,125.6 ; 9.53,90.6 9.53,99.6 ; 9.53,116.6 9.53,125.6 ; 12.07,90.6 12.07,99.6 ; 12.07,116.6 12.07,125.6 ; 14.61,90.6 14.61,99.6 ; 14.61,116.6 14.61,125.6 ; 15.735,90.6 17.15,90.6 17.15,99.6 ; 15.735,116.6 17.15,116.6 17.15,125.6 ; 17.735,90.6 19.69,90.6 19.69,99.6 ; 17.735,116.6 19.69,116.6 19.69,125.6 ; 19.735,90.6 22.23,90.6 22.23,99.6 ; 19.735,116.6 22.23,116.6 22.23,125.6 ; -3.17,90.6 24.77,90.6 24.77,99.6 -3.17,99.6 -3.17,90.6 ; -3.17,116.6 -3.17,125.6 24.77,125.6 24.77,116.6 -3.17,116.6
  text "P5V0" at 24.77,125.6 h1.5 r90
  text "P0.23" at -1.4,125.1 h1.5 r90
  text "P0.22" at 1.14,125.1 h1.5 r90
  text "P0.21" at 3.68,125.1 h1.5 r90
  text "P0.20" at 6.22,125.1 h1.5 r90
  text "P0.19" at 8.76,125.1 h1.5 r90
  text "P0.18" at 11.3,125.1 h1.5 r90
  text "P0.17" at 13.84,125.1 h1.5 r90
  text "P0.16" at 16.38,125.1 h1.5 r90
  text "GND" at 18.92,125.1 h1.5 r90
  text "P3V3" at 21.46,125.1 h1.5 r90
  text "nRF52832 MCU-Board" at 31.3,121.6 h3 r90
  text "P5V0" at -1.4,120.6 h1.5 r90
  text "P3V3" at 1.14,120.6 h1.5 r90
  text "GND" at 3.68,120.6 h1.5 r90
  text "P0.31" at 6.22,120.6 h1.5 r90
  text "P0.30" at 8.76,120.6 h1.5 r90
  text "P0.29" at 11.3,120.6 h1.5 r90
  text "P0.28" at 13.84,120.6 h1.5 r90
  text "P0.27" at 16.38,120.6 h1.5 r90
  text "P0.26" at 18.92,120.6 h1.5 r90
  text "P0.25" at 21.46,120.6 h1.5 r90
  text "P0.24" at 24,120.6 h1.5 r90
  text "SN:" at 4.3,115.6 h2 r90
  text "n" at 24.4,113.9 h12 r90
  text "PCA70107/3" at 7.8,113.1 h3 r90
  text "400242" at 10.3,113.1 h3 r90
  text "0002OYSM" at 12.3,113.1 h1 r90
  text "P0.08" at -1.4,99.1 h1.5 r90
  text "P0.09*" at 1.14,99.1 h1.5 r90
  text "P0.10*" at 3.68,99.1 h1.5 r90
  text "P0.11" at 6.22,99.1 h1.5 r90
  text "P0.12" at 8.76,99.1 h1.5 r90
  text "P0.13" at 11.3,99.1 h1.5 r90
  text "P0.14" at 13.84,99.1 h1.5 r90
  text "P0.15" at 16.38,99.1 h1.5 r90
  text "GND" at 18.92,99.1 h1.5 r90
  text "P3V3" at 21.46,99.1 h1.5 r90
  text "P5V0" at 24,99.1 h1.5 r90
  text "P5V0" at -0.63,95.1 h1.5 r90
  text "P3V3" at 1.14,94.6 h1.5 r90
  text "GND" at 3.68,94.6 h1.5 r90
  text "P0.00*" at 6.22,94.6 h1.5 r90
  text "P0.01*" at 8.76,94.6 h1.5 r90
  text "P0.02" at 11.3,94.6 h1.5 r90
  text "P0.03" at 13.84,94.6 h1.5 r90
  text "P0.04" at 16.38,94.6 h1.5 r90
  text "P0.05" at 18.92,94.6 h1.5 r90
  text "P0.06" at 21.46,94.6 h1.5 r90
  text "P0.07" at 24,94.6 h1.5 r90
Mechanical 1:
  the board outline again, w0.152

## Text inside footprints (layer, text, board x,y; h text height)
P3: Top Overlay "1" at 114.2,4.661 h1.02